# EAGLE board parent (EAGLE 9.6.2)
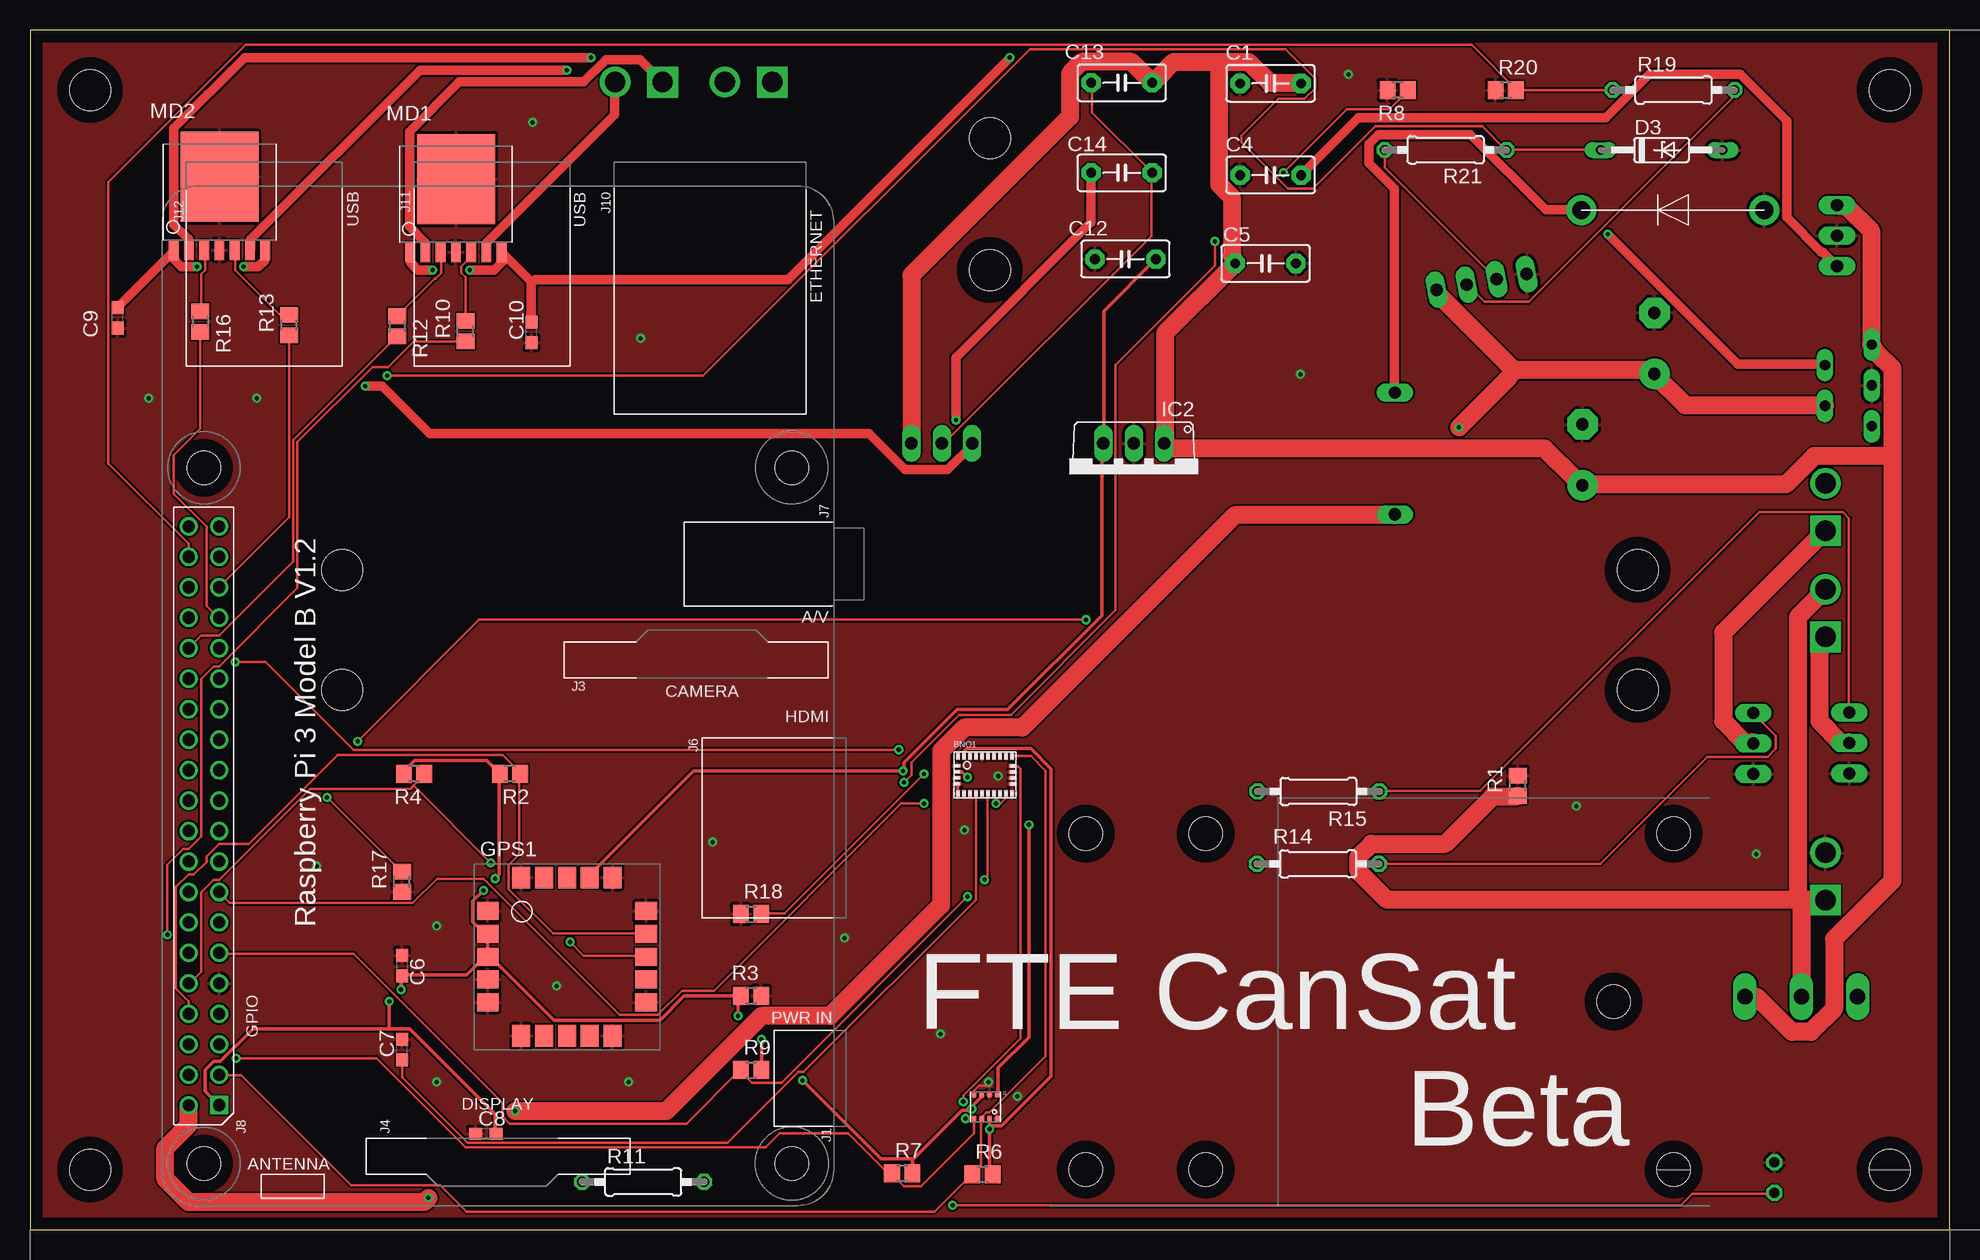
[diagram p0: board, top side]
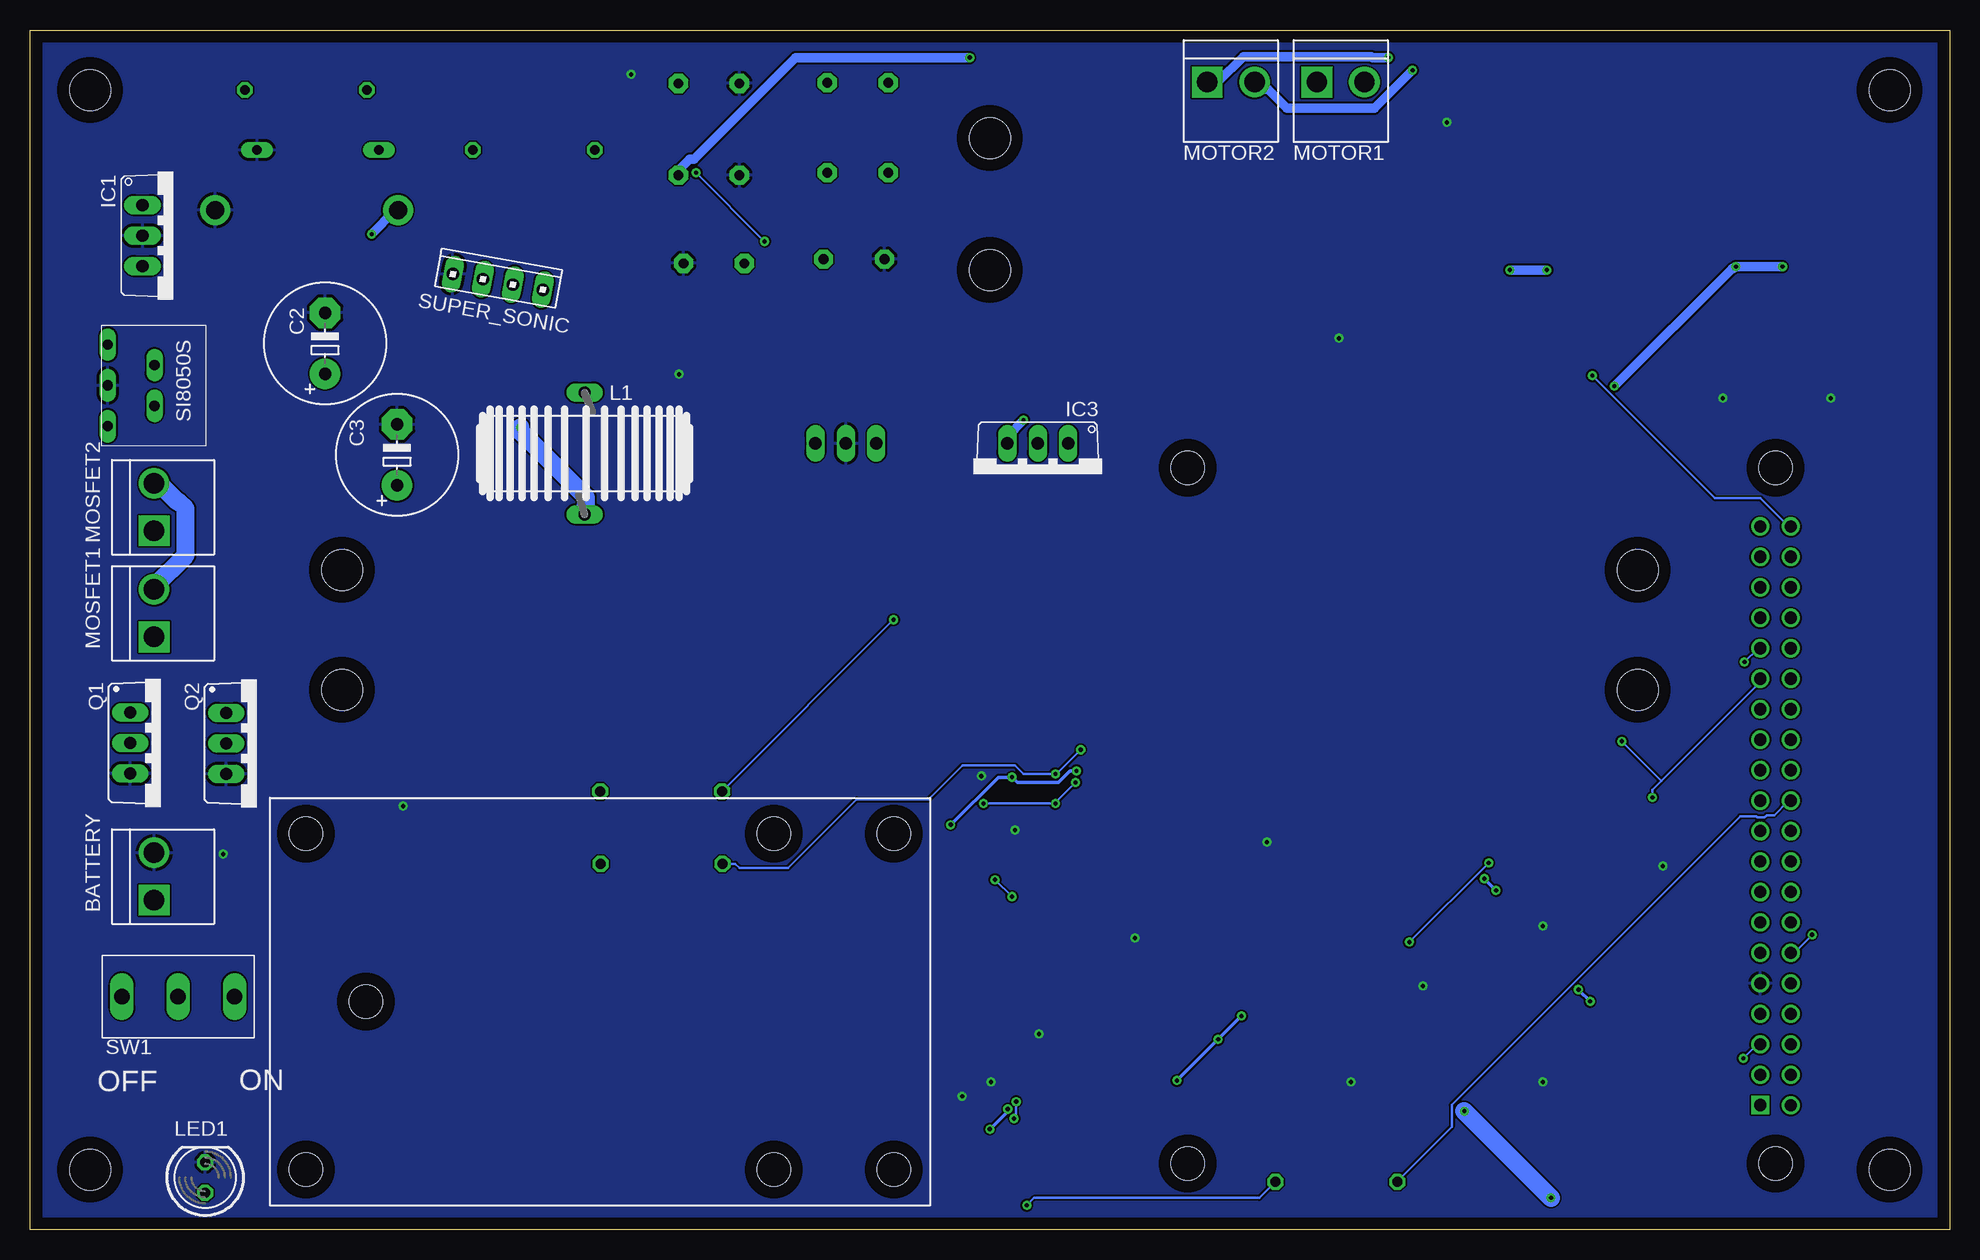
[diagram p1: board, bottom side, seen from below]

Size 160 x 100 mm. Coordinates in mm from the lower left corner, seen from the top.
Outline: 0,0 160,0 160,100 0,100 0,0
Copper layers (1*16): Top 0.035mm / dielectric 1.5mm / Bottom 0.035mm
Design rules "default": minimum track width 6mil, minimum drill 0.35mm, track to track 6mil, track to pad 6mil, pad to pad 6mil, via to via 6mil, smd to smd 6mil, copper to edge 40mil, drill to drill 6mil, minimum pad ring 10mil, minimum via ring 8mil, stop-mask expansion 4mil, vias tented up to drill 0mil, thermal gap 10mil
Net classes: 0 default: width 0.2 mm, clearance 0.05 mm; 1 power: width 1.5 mm, clearance 0.2 mm; 2 mos: width 1.5 mm, clearance 0.2 mm; 3 signal: width 0.2 mm, clearance 0.05 mm; 4 motor: width 0.8 mm, clearance 0.1 mm; 5 sensor: width 0.3 mm, clearance 0.05 mm
Holes 3.4 mm at 5,5 5,95 155,5 155,95 80,91 80,80 26,55 26,45 134,45 134,55
Holes 2.8 mm at 137,33 137,5 98,5 88,5 88,33 98,33 132,19

## Footprints (pad centres in the part's own frame; a part is rotated, then mirrored left to right if it is on the bottom)
B2P-VH = drill 1.7 square: 1 -1.98,0 | drill 1.7: 2 1.98,0
BNO055 = smd 0.305 x 0.61: P$1 0.35,3.47; P$6 0.355,0.35; P$7 0.855,0.35; P$8 1.355,0.35; P$9 1.855,0.35; P$10 2.355,0.35; P$11 2.855,0.35; P$12 3.355,0.35; P$13 3.855,0.35; P$14 4.355,0.35; P$15 4.855,0.35; P$20 4.85,3.47; P$21 4.35,3.47; P$22 3.85,3.47; P$23 3.35,3.47; P$24 2.85,3.47; P$25 2.35,3.47; P$26 1.85,3.47; P$27 1.35,3.47; P$28 0.85,3.47 | smd 0.61 x 0.305: P$2 0.275,2.655; P$3 0.275,2.155; P$4 0.275,1.655; P$5 0.275,1.155; P$16 4.915,1.15; P$17 4.915,1.65; P$18 4.915,2.15; P$19 4.915,2.65
C5B3 = drill 0.813 pad 1.6 octagon: 1 -2.54,0; 2 2.54,0
E5-10,5 = drill 1.016 pad 2.54: + -2.54,0 | drill 1.016 pad 2.54 octagon: - 2.54,0
C1608 = smd 1.1 x 1: 1 -0.85,0; 2 0.85,0
DO35Z10 = drill 0.813 long: A 5.08,0; C -5.08,0
DIODE_1.5 = drill 1.5 pad 2.5: P$1 -7.62,0; P$2 7.62,0
SAM-M8Q = smd 1.8 x 1.5: P$1 1.15,11.55; P$2 1.15,9.65; P$3 1.15,7.75; P$4 1.15,5.85; P$5 1.15,3.95; P$11 14.35,3.95; P$12 14.35,5.85; P$13 14.35,7.75; P$14 14.35,9.65; P$15 14.35,11.55 | smd 1.5 x 1.8: P$6 3.95,1.15; P$7 5.85,1.15; P$8 7.75,1.15; P$9 9.65,1.15; P$10 11.55,1.15; P$16 11.55,14.35; P$17 9.65,14.35; P$18 7.75,14.35; P$19 5.85,14.35; P$20 3.95,14.35
TO220V = drill 1.016 long: 1 -2.54,-2.54; 2 0,-2.54; 3 2.54,-2.54
SFT830D = drill 1.016 long: 1 -5.08,0; 2 5.08,0
LED5MM = drill 0.813 octagon: A -1.27,0; K 1.27,0
BD62**_HRP7 = smd 0.813 x 1.676: P$1 0.887,-0.835; P$2 2.158,-0.835; P$3 3.428,-0.835; P$4 4.697,-0.835; P$5 5.968,-0.835; P$6 7.237,-0.835; P$7 8.508,-0.835 | smd 6.5 x 7.49: P$8 4.7,5.272
RPI3 = drill 1.016 square: P$1 8.37,51.23 | drill 1.016: P$2 8.357,53.772; P$3 10.897,51.232; P$4 10.897,53.772; P$5 13.437,51.232; P$6 13.437,53.772; P$7 15.977,51.232; P$8 15.977,53.772; P$9 18.517,51.232; P$10 18.517,53.772; P$11 21.057,51.232; P$12 21.057,53.772; P$13 23.597,51.232; P$14 23.597,53.772; P$15 26.137,51.232; P$16 26.137,53.772; P$17 28.677,51.232; P$18 28.677,53.772; P$19 31.217,51.232; P$20 31.217,53.772; P$21 33.757,51.232; P$22 33.757,53.772; P$23 36.297,51.232; P$24 36.297,53.772; P$25 38.837,51.232; P$26 38.837,53.772; P$27 41.377,51.232; P$28 41.377,53.772; P$29 43.917,51.232; P$30 43.917,53.772; P$31 46.457,51.232; P$32 46.457,53.772; P$33 48.997,51.232; P$34 48.997,53.772; P$35 51.537,51.232; P$36 51.537,53.772; P$37 54.077,51.232; P$38 54.077,53.772; P$39 56.617,51.232; P$40 56.617,53.772 | hole 2.75: 3.5,3.5; 61.5,3.5; 3.5,52.5; 61.5,52.5
TO220BV = drill 1.016 long: D 0,-2.54; G -2.54,-2.54; S 2.54,-2.54
R2012 = smd 1.3 x 1.5: 1 -0.85,0; 2 0.85,0
0207/10 = drill 0.813 octagon: 1 -5.08,0; 2 5.08,0
BME280 = smd 0.5 x 0.35: P$1 2.275,2.225; P$2 2.275,1.575; P$3 2.275,0.925; P$4 2.275,0.275; P$5 0.225,0.275; P$6 0.225,0.925; P$7 0.225,1.575; P$8 0.225,2.225
SI8050S = drill 0.85 pad 0.9 long: P$1 -3.4,-8.2; P$2 -1.7,-4.3; P$3 0,-8.2; P$4 1.7,-4.3; P$5 3.4,-8.2
10X04MTA = drill 1.016 long: 1 3.81,0; 2 1.27,0; 3 -1.27,0; 4 -3.81,0
TOGGLE_1MS1-T1-B1-M2-Q-N-S = drill 1.3 long: P$1 1.65,3.43; P$2 6.35,3.43; P$3 11.05,3.43

## Placement (x,y rotation side)
BATTERY  [B2P-VH]  149.65,29.43 90 bottom
BNO1  BNO055  [BNO055]  77,36 0 top
C1  0.33u  [C5B3]  103.41,95.55 180 top
C2  1000uF  [E5-10,5]  135.4,73.88 90 bottom
C3  1000uF  [E5-10,5]  129.4,64.58 90 bottom
C4  0.1u  [C5B3]  103.41,87.9 180 top
C5  0.33u  [C5B3]  102.99,80.55 0 top
C6  0.1u  [C1608]  31,22 270 top
C7  0.1u  [C1608]  31,15 90 top
C8  0.1u  [C1608]  38,8 0 top
C9  0.1u  [C1608]  7.3,76 90 top
C10  0.1u  [C1608]  41.8,74.8 90 top
C12  0.1u  [C5B3]  91.31,80.9 180 top
C13  0.33u  [C5B3]  91,95.6 180 top
C14  0.1u  [C5B3]  91,88.1 0 top
D3  GDZJ3.3B  [DO35Z10]  136,90 0 top
DIODE_1.1  DIODE_1.5  [DIODE_1.5]  136.95,84.99 180 top
GPS1  SAM-M8Q  [SAM-M8Q]  37,15 0 top
IC1  NJM7806FA  [TO220V]  148.08,82.86 270 bottom
IC2  TA48033S  [TO220V]  92,63 180 top
IC3  NJM7806FA  [TO220V]  76,63 180 bottom
L1  150uH  [SFT830D]  113.77,64.7 270 bottom
LED1  [LED5MM]  145.4,4.33 90 bottom
MD1  BD622_HFP  [BD62**_HRP7]  30.8,82.3 0 top
MD2  BD622_HFP  [BD62**_HRP7]  11.1,82.5 0 top
MOSFET1  [B2P-VH]  149.65,51.38 90 bottom
MOSFET2  [B2P-VH]  149.65,60.22 90 bottom
MOTOR1  [B2P-VH]  50.75,95.65 0 bottom
MOTOR2  [B2P-VH]  59.91,95.65 0 bottom
PCB1  RPI3RPI3  [RPI3]  67,2 90 top
Q1  2SK4017  [TO220BV]  149.11,40.56 270 bottom
Q2  2SK4017  [TO220BV]  141.11,40.53 270 bottom
R1  1M  [R2012]  124,37 90 top
R2  10k  [R2012]  40,38 180 top
R3  10k  [R2012]  60.1,19.5 0 top
R4  10k  [R2012]  32,38 180 top
R6  10k  [R2012]  79.4,4.6 0 top
R7  10k  [R2012]  72.7,4.7 0 top
R8  10k  [R2012]  114,95 180 top
R9  10k  [R2012]  60.1,13.3 0 top
R10  1k  [R2012]  36.3,74.9 90 top
R11  470  [0207/10]  51.11,3.97 0 top
R12  1k  [R2012]  30.6,75.3 270 top
R13  1k  [R2012]  21.6,75.4 90 top
R14  100  [0207/10]  107.36,30.48 180 top
R15  100  [0207/10]  107.4,36.52 180 top
R16  1k  [R2012]  14.2,75.7 270 top
R17  10k  [R2012]  31,29 90 top
R18  10k  [R2012]  60.1,26.3 0 top
R19  100  [0207/10]  137,95 0 top
R20  10k  [R2012]  123,95 0 top
R21  220  [0207/10]  118,90 180 top
S1  BME280  [BME280]  78.4,11.5 270 top
SI8050S1  SI8050S  [SI8050S]  145.32,70.37 270 bottom
SUPER_SONIC  [10X04MTA]  121,79 350 bottom
SW1  TOGGLE  [TOGGLE_1MS1-T1-B1-M2-Q-N-S]  154,16 0 bottom

## Library data of the parts
BATTERY MOSFET1 MOSFET2 MOTOR1 MOTOR2 = CONN_VH
BNO1 = BNO055
C1 C4 C5 C12-C14 = capacitor-wima
C2 C3 = resistor
C6-C10 = rcl; SPICEPREFIX: C
D3 = diode
DIODE_1.1 = diode_1.5mm
GPS1 = GPS
IC1-IC3 = linear
L1 = inductors; SPICEPREFIX: L
LED1 = led
MD1 MD2 = BD62_
PCB1 = Raspberry Pi 3 model B
Q1 Q2 = transistor-power
R1-R4 R6-R21 = rcl; SPICEPREFIX: R
S1 = BME280
SI8050S1 = SI-8050S
SUPER_SONIC = con-amp
SW1 = switch

## Nets
+3V3@0 [sensor]: BNO1.P$3 C12.1 GPS1.P$17 IC2.3 S1.P$8
+3V3@1 [sensor]: BNO1.P$28 C6.2 C8.2 GPS1.P$2 GPS1.P$3 PCB1.P$1 R2.2 R3.1 R4.2 R6.2 R7.2 R9.2 S1.P$2 S1.P$6
+5V [power]: C2.+ L1.2 PCB1.P$2 SI8050S1.P$4 SUPER_SONIC.1
+6V@0 [motor]: C4.1 C10.2 IC1.3 MD1.P$1 MD1.P$7
+6V@1 [motor]: C9.2 C14.1 IC3.3 MD2.P$1 MD2.P$7
+7.4V [power]: BATTERY.1 MOSFET1.2 MOSFET2.2 R1.1 SW1.P$2
BNO_INT [signal]: BNO1.P$14 PCB1.P$15 R8.1
BNO_RESET [signal]: BNO1.P$11 PCB1.P$11 R9.1
CAP [signal]: BNO1.P$9 C7.1
FIN1 [signal]: PCB1.P$32 R12.2
FIN2 [signal]: PCB1.P$33 R16.2
GND: BATTERY.2 BNO1.P$2 BNO1.P$4 BNO1.P$5 BNO1.P$6 BNO1.P$15 BNO1.P$16 BNO1.P$17 BNO1.P$18 BNO1.P$25 C1.2 C2.- C3.- C4.2 C5.2 C6.1 C7.2 C8.1 C9.1 C10.1 C12.2 D3.A DIODE_1.1.P$1 GPS1.P$1 GPS1.P$4 GPS1.P$5 GPS1.P$6 GPS1.P$10 GPS1.P$11 GPS1.P$15 GPS1.P$16 GPS1.P$20 IC1.2 IC2.2 LED1.K MD1.P$4 MD1.P$8 MD2.P$4 MD2.P$8 PCB1.P$9 Q1.S Q2.S R1.2 R3.2 R8.2 R17.1 R18.1 R20.1 S1.P$1 S1.P$5 S1.P$7 SI8050S1.P$3 SUPER_SONIC.4
GPS_RXD [signal]: GPS1.P$14 PCB1.P$8 R2.1
GPS_TXD [signal]: GPS1.P$13 PCB1.P$10 R4.1
MOSFET1 [signal]: PCB1.P$29 R15.2 R17.2
MOSFET2 [signal]: PCB1.P$31 R14.2 R18.2
MOTOR11 [motor]: MD1.P$2 MOTOR1.1
MOTOR12 [motor]: MD1.P$6 MOTOR1.2
MOTOR21 [motor]: MD2.P$2 MOTOR2.1
MOTOR22 [motor]: MD2.P$6 MOTOR2.2
N$2 [motor]: DIODE_1.1.P$2 L1.1 SI8050S1.P$2
N$3 [signal]: PCB1.P$22 R11.1
N$4 [power]: C1.1 C3.+ C5.1 C13.1 IC1.1 IC2.1 IC3.1 SI8050S1.P$1 SW1.P$3
N$5: LED1.A R11.2
N$6 [mos]: MOSFET1.1 Q1.D
N$7: MD1.P$3 R12.1
N$8 [mos]: MOSFET2.1 Q2.D
N$9: MD1.P$5 R10.2
N$10: Q1.G R15.1
N$11: Q2.G R14.1
N$12: MD2.P$3 R16.1
N$13: C13.2 C14.2 IC3.2
N$14: MD2.P$5 R13.2
N$15: R19.2 SUPER_SONIC.2
N$16: R21.2 SUPER_SONIC.3
RIN1 [signal]: PCB1.P$12 R10.1
RIN2 [signal]: PCB1.P$35 R13.1
SCL [signal]: BNO1.P$19 PCB1.P$5 R7.1 S1.P$4
SDA [signal]: BNO1.P$20 PCB1.P$3 R6.1 S1.P$3
SONIC_ECHO [signal]: D3.C PCB1.P$40 R21.1
SONIC_TRIG [signal]: PCB1.P$38 R19.1 R20.2

## Tracks (layer width: path | path; a pad name or v marks a point on that pad's centre or on a via)
+3V3@0  (via drill 0.35)
  Top 0.3: C12.1 93.83,80.88 89.51,76.56 89.51,65.55 IC2.3 89.33,65.46 89.33,51.19 81.49,43.34 77.26,43.34 72.86,38.94 72.86,38.32 v72.77,38.23 55.33,38.23 46.69,29.6 46.69,29.43 GPS1.P$17 | v83.25,33.74 83.25,16.03 80.7,13.48 80.7,11.28 S1.P$8 | v78.14,37.71 77.7,38.15 77.35,38.15 BNO1.P$3
  Bottom 0.3: v83.25,33.74 79.29,37.71 v78.14,37.71 77.7,37.27 74.27,37.27 73.3,38.23 v72.77,38.23
+3V3@1  (via drill 0.35)
  Top 0.3: 78.41,10.13 78.23,9.96 77.7,9.96 73.56,5.82 | 78.41,10.13 79.29,11.01 79.29,11.19 S1.P$6 | 73.56,5.82 73.56,4.76 R7.2 | 80,8.63 v80,8.37 80,4.85 80.17,4.67 R6.2 | 80,8.63 80,9.16 S1.P$2 | 80,8.63 80.96,8.63 85.11,12.77 85.11,38.41 83.43,40.09 78.06,40.09 77.88,39.91 77.88,39.56 BNO1.P$28 | v78.5,10.04 78.41,10.13 | 29.95,16.74 18.59,16.74 15.86,14.01 15.33,14.01 14.62,13.3 14.62,11.54 15.77,10.4 PCB1.P$1 | 29.95,16.74 31.63,16.74 38.76,9.6 38.76,8.02 C8.2 | R4.2 31.19,38.06 31.19,38.23 32.07,39.12 38.06,39.12 39.12,38.06 R2.2 39.12,37.88 39.12,29.6 v38.76,29.25 | GPS1.P$3 38.15,22.73 37.88,22.73 36.38,21.23 31.01,21.23 C6.2 30.92,21.06 v30.92,20 | GPS1.P$3 38.23,22.64 38.5,22.64 43.7,17.44 52.51,17.44 54.53,19.47 59.2,19.47 R3.1 59.03,19.38 v59.03,17.8 | v60.97,15.86 60.97,13.3 R9.2 | GPS1.P$3 38.15,22.82 38.15,24.58 GPS1.P$2 38.06,24.76 37.8,24.76 36.91,25.64 36.91,27.4 v37.8,28.28 | v29.95,19.03 29.95,16.74 | v64.4,12.42 70.92,5.9 73.47,5.9 73.56,5.82
  Bottom 0.3: v78.5,10.04 78.5,9.87 v80,8.37 | v59.03,17.8 v60.97,15.86 v64.4,12.42 | v37.8,28.28 v38.76,29.25 | v30.92,20 v29.95,19.03
+5V  (via drill 0.35)
  Top 1.5: SI8050S1.P$4 149.59,68.72 137.97,68.72 135.41,71.27 C2.+ 134.71,71.62 123.69,71.62 | 123.69,71.62 117.26,78.06 117.26,78.32 SUPER_SONIC.1 | v33.21,2.64 32.86,2.29 13.21,2.29 11.28,4.23 11.28,6.78 13.21,8.72 13.21,10.31 PCB1.P$2 | v40.44,9.87 53.04,9.87 60.97,17.8 66.69,17.8 75.94,27.05 75.94,39.91 77.88,41.85 82.73,41.85 100.43,59.56 113.74,59.56 L1.2 | v119.11,66.87 123.25,71.01 123.69,71.62
  Bottom 1.5: v40.44,9.87 v33.21,2.64 | v119.11,66.87 119.11,66.52 113.65,61.05 113.65,60.26 113.74,60.17 113.74,59.64 L1.2
+6V@0  (via drill 0.35)
  Top 0.8: 41.76,79.03 41.76,75.68 C10.2 | 41.76,79.03 39.38,81.4 MD1.P$7 39.47,80.79 38.68,80 v36.65,80 | v33.57,80 32.33,80 31.72,80.61 31.72,81.4 MD1.P$1 | IC1.3 150.56,80.35 149.42,81.49 149.33,81.49 146.42,84.4 146.42,92.42 142.55,96.29 134.97,96.29 131.36,92.68 110.74,92.68 105.98,87.92 C4.1 | v81.67,97.7 63.17,79.2 42.11,79.2 41.76,79.03
  Bottom 0.8: v36.65,80 v33.57,80 | v81.67,97.7 96.2,97.7 104.66,89.25 105.02,89.25 105.9,88.36 105.9,87.92 C4.1
+6V@1  (via drill 0.35)
  Top 0.8: C9.2 7.31,76.91 11.98,81.58 MD2.P$1 11.89,80.96 12.6,80.26 v13.92,80.26 | v17.8,80.26 19.03,80.26 19.56,80.79 19.56,81.58 MD2.P$7 | v77.18,67.48 77.18,72.68 88.45,83.96 C14.1 | v27.93,70.3 29.34,70.3 33.3,66.34 69.95,66.34 72.95,63.34 76.47,63.34 78.58,65.46 IC3.3
  Bottom 0.8: v13.92,80.26 v17.8,80.26 18.15,80.08 v27.93,70.3 | v77.18,67.48 78.5,66.16 78.5,65.55 IC3.3
+7.4V
  Top 1.5: 147.66,27.49 149.59,27.49 BATTERY.1 | 147.66,27.49 147.39,27.49 | 147.39,27.49 113.12,27.49 110.74,29.87 110.74,31.1 111.8,32.16 117.97,32.16 121.93,36.12 123.96,36.12 R1.1 | 147.66,27.49 147.66,19.47 SW1.P$2 | 147.39,27.49 147.39,51.1 149.59,53.3 MOSFET1.2
  Bottom 1.5: MOSFET2.2 149.59,62.2 149.24,62.2 147.74,60.7 147.66,60.7 147.04,60.08 147.04,56.21 149.59,53.65 149.59,53.39 MOSFET1.2
BNO_INT  (via drill 0.35)
  Top 0.2: v80.52,35.5 80.88,35.5 81.32,35.95 81.32,36.3 BNO1.P$14 | v74.53,35.5 72.59,35.5 57,19.91 54.36,19.91 52.33,17.88 49.16,17.88 37.8,29.25 33.92,29.25 31.89,27.22 16.65,27.22 15.77,28.1 PCB1.P$15 | v104.49,88.1 109.77,93.39 113.3,93.39 114.09,94.18 114.09,94.27 114.79,94.97 R8.1 | v98.76,82.37 98.76,80.35 90.48,72.07 90.48,51.63 81.76,42.91 77.44,42.91 73.47,38.94 73.47,37.88 v72.86,37.27
  Bottom 0.2: v80.52,35.5 v74.53,35.5 74.53,35.59 v72.86,37.27 | v98.76,82.37 v104.49,88.1
BNO_RESET  (via drill 0.35)
  Top 0.2: v79.55,29.16 79.82,29.43 79.82,36.3 BNO1.P$11 | v78.14,27.75 62.64,12.25 60.17,12.25 59.2,13.21 R9.1 59.12,13.21 54.71,8.81 40,8.81 39.38,9.43 39.38,10.57 26.96,22.99 15.77,22.99 PCB1.P$11
  Bottom 0.2: v78.14,27.75 v79.55,29.16
CAP
  Top 0.2: BNO1.P$9 78.85,36.3 78.85,27.49 64.49,13.13 64.05,13.13 58.15,7.22 36.47,7.22 31.01,12.69 31.01,14.1 C7.1
FIN1
  Top 0.2: R12.2 30.57,74.44 21.94,65.81 21.94,55.68 15.77,49.51 14.27,49.51 13.3,48.54 PCB1.P$32
FIN2
  Top 0.2: R16.2 14.18,74.8 14.18,66.78 11.98,64.58 11.98,61.32 14.71,58.59 14.71,51.98 15.68,51.01 PCB1.P$33
GND  (via drill 0.35)
  Top 0.2: S1.P$5 78.67,11.57 79.1,12 80,12 | BNO1.P$5 77.36,37.08 BNO1.P$6
  other vias: 82.3,11.1 79.9,12.3 67.9,24.3 56.9,32.3 77.9,33.3 80.7,37.8 75.9,16.3 50.9,74.3 33.9,12.3 33.9,25.3 23.9,30.3 128.9,35.3 143.9,31.3 105.9,71.3 109.9,96.3 41.9,92.3 18.9,69.3 9.9,69.3 49.9,12.3 43.9,20.3
  pour Bottom: 0,0 160,0 160,100 0,100
  pour Top: 0,0 160,0 160,100 0,100
GPS_RXD
  Top 0.2: GPS1.P$14 51.27,24.67 43.61,24.67 39.91,28.37 39.91,30.39 40.79,31.28 40.79,37.97 R2.1 40.88,38.06 39.38,39.56 25.64,39.56 18.24,32.16 15.77,32.16 14.71,31.1 14.71,30.66 13.65,29.6 13.21,29.6 12.16,28.54 12.16,20.09 13.21,19.03 13.21,18.06 PCB1.P$8
GPS_TXD  (via drill 0.35)
  Top 0.2: 31.98,37 31.72,36.74 23.35,36.74 15.77,29.16 15.33,29.16 14.27,28.1 14.27,21.5 13.3,20.53 PCB1.P$10 | 31.98,37 32.77,37.8 32.77,37.97 R4.1 | v45.02,23.96 46.16,22.82 51.27,22.82 GPS1.P$13 | 31.98,37 v38.41,30.57
  Bottom 0.2: v38.41,30.57 v45.02,23.96
MOSFET1  (via drill 0.35)
  Top 0.2: v24.76,36.03 30.92,29.87 R17.2 | v88.01,50.83 37.44,50.83 v27.31,40.7
  Bottom 0.2: v24.76,36.03 24.76,36.65 24.01,37.4 | 24.01,37.4 15.77,45.64 15.77,45.9 PCB1.P$29 | v88.01,50.83 102.28,36.56 R15.2 | 24.01,37.4 v27.31,40.7
MOSFET2  (via drill 0.35)
  Top 0.2: v74.53,37.97 62.9,26.34 60.97,26.34 R18.2 | v17.09,47.31 19.65,47.31 26.96,40 v72.42,40
  Bottom 0.2: R14.2 102.2,30.48 101.23,30.48 100.87,30.13 96.82,30.13 91.09,35.86 85.11,35.86 82.28,38.68 77.88,38.68 77.18,37.97 v74.53,37.97 74.44,37.97 v72.42,40 | v17.09,47.31 15.95,48.45 PCB1.P$31
MOTOR11
  Top 0.8: MD1.P$2 32.95,81.49 32.95,82.28 31.63,83.61 31.63,91.54 35.77,95.68 46.16,95.68 48.01,97.53 50.83,97.53 52.68,95.68 MOTOR1.1
MOTOR12
  Top 0.8: MD1.P$6 38.06,81.49 38.06,82.28 48.72,92.94 48.72,95.59 MOTOR1.2
MOTOR21  (via drill 0.35)
  Top 0.8: v46.78,97.7 17.88,97.7 11.98,91.8 11.98,83.78 13.21,82.55 13.21,81.67 MD2.P$2
  Bottom 0.8: v46.78,97.7 48.1,97.7 48.19,97.79 58.85,97.79 60.97,95.68 61.85,95.68 MOTOR2.1
MOTOR22  (via drill 0.35)
  Top 0.8: v44.76,96.65 32.51,96.65 18.41,82.55 18.41,81.67 MD2.P$6
  Bottom 0.8: v44.76,96.65 47.93,93.47 55.24,93.47 56.83,95.06 57,95.06 57.53,95.59 57.88,95.59 MOTOR2.2
N$2  (via drill 0.35)
  Top 0.8: v131.53,82.99 142.37,72.15 149.59,72.15 SI8050S1.P$2 | L1.1 113.74,69.86 113.74,86.78 111.62,88.89 111.62,90.48 112.42,91.27 120.08,91.27 126.33,85.02 129.24,85.02 DIODE_1.1.P$2
  Bottom 0.8: v131.53,82.99 129.59,84.93 129.33,84.93 DIODE_1.1.P$2
N$3
  Bottom 0.2: R11.1 45.99,4.05 41.49,8.55 41.49,10.4 17.44,34.45 16.12,34.45 16.03,34.36 15.42,34.36 15.24,34.53 14.62,34.53 13.48,35.68 13.3,35.68 PCB1.P$22
N$4
  Top 1.5: IC3.1 73.47,65.55 73.47,79.55 86.69,92.77 86.69,96.38 87.66,97.35 91.8,97.35 93.47,95.68 C13.1 94.09,96.12 95.32,97.35 99.11,97.35 | 99.11,97.35 101.58,97.35 103.34,95.59 105.9,95.59 C1.1 | 99.11,97.35 99.11,87.13 100.17,86.07 100.17,81.23 C5.1 100.43,80.52 94.62,74.71 94.62,65.55 IC2.1 95.24,65.11 126.25,65.11 128.8,62.55 C3.+ 129.42,62.11 146.33,62.11 148.71,64.49 155.23,64.49 | IC1.1 150.65,85.37 151.36,85.37 153.47,83.25 153.47,73.83 SI8050S1.P$1 153.91,73.12 155.23,71.8 155.23,64.49 | 155.23,64.49 155.23,29.07 150.39,24.23 150.39,18.41 148.45,16.48 146.86,16.48 143.96,19.38 142.99,19.38 SW1.P$3
N$5  (via drill 0.35)
  Top 0.2: v76.91,2.03 137.61,2.03 138.58,3 145.37,3 LED1.A
  Bottom 0.2: v76.91,2.03 76.3,2.64 57.53,2.64 56.21,3.96 R11.2
N$6
  Top 1.5: Q1.D 151.62,40.61 150.91,40.61 149.15,42.38 149.15,48.9 149.59,49.34 MOSFET1.1
N$7
  Top 0.2: R12.1 30.66,76.21 33.74,79.29 33.83,79.29 34.27,79.73 34.27,81.4 MD1.P$3
N$8
  Top 1.5: Q2.D 143.6,40.61 142.9,40.61 141.14,42.38 141.14,49.78 149.59,58.23 MOSFET2.1
N$9
  Top 0.2: R10.2 36.3,75.77 36.3,79.38 35.95,79.73 35.95,80.26 36.74,81.05 36.74,81.4 MD1.P$5
N$10
  Top 0.2: R15.1 112.5,36.56 120.87,36.56 144.13,59.82 151.09,59.82 151.62,59.29 151.62,43.17 Q1.G
N$11
  Top 0.2: R14.1 112.5,30.48 130.92,30.48 139.81,39.38 144.84,39.38 145.54,40.09 145.54,41.14 143.69,42.99 Q2.G
N$12
  Top 0.2: R16.1 14.27,76.56 14.27,79.64 14.62,80 14.62,81.49 14.54,81.58 MD2.P$3
N$13
  Top 0.2: IC3.2 76.03,65.55 76.21,65.55 93.47,82.81 93.47,88.1 C14.2 93.47,88.19 88.54,93.12 88.54,95.59 C13.2
N$14
  Top 0.2: R13.2 21.58,76.3 20.79,76.3 17.09,80 17.09,81.58 MD2.P$5
N$15
  Top 0.2: R19.2 142.02,94.97 142.02,94.44 124.93,77.35 121.23,77.35 119.82,78.76 SUPER_SONIC.2
N$16
  Top 0.2: R21.2 112.94,89.95 112.94,88.54 122.19,79.29 SUPER_SONIC.3
RIN1  (via drill 0.35)
  Top 0.2: v11.45,24.58 11.45,30.39 12.77,31.72 13.21,31.72 14.27,32.77 14.27,45.9 15.33,46.96 15.77,46.96 22.29,53.48 22.29,65.64 28.54,71.89 29.87,71.89 31.98,74 36.3,74 R10.1
  Bottom 0.2: v11.45,24.58 12.95,23.08 13.21,23.08 PCB1.P$12
RIN2
  Top 0.2: R13.1 21.58,74.53 21.58,59.38 15.77,53.56 PCB1.P$35
SCL  (via drill 0.35)
  Top 0.2: v77.79,10.66 77.79,11.19 82.55,15.95 82.55,38.41 82.37,38.59 81.93,38.59 BNO1.P$19 | v77.97,9.25 78.58,9.25 S1.P$4 78.67,9.16 78.67,8.02 74.27,3.61 72.86,3.61 71.8,4.67 R7.1 71.71,4.67 71.54,4.67 68.19,8.02 62.46,8.02 61.32,6.87 36.3,6.87 28.9,14.27 v17.18,14.27
  Bottom 0.2: v77.79,10.66 77.79,9.43 v77.97,9.25 | v17.18,14.27 16.03,15.42 15.77,15.42 PCB1.P$5
SDA
  Top 0.2: BNO1.P$20 81.93,39.47 83.43,39.47 84.66,38.23 84.66,14.45 80,9.78 79.73,9.78 79.38,9.43 79.38,9.25 S1.P$3 79.29,9.16 79.29,5.37 78.58,4.67 R6.1 78.5,4.58 75.41,1.5 36.38,1.5 34.18,3.7 26.78,3.7 17.62,12.86 15.77,12.86 PCB1.P$3
SONIC_ECHO  (via drill 0.35)
  Top 0.2: D3.C 130.92,90.04 123.16,90.04 R21.1 122.99,90.04 121.05,91.98 112.15,91.98 106.95,86.78 104.84,86.78 100.96,90.66 100.96,91.18 104.05,94.27 106.25,94.27 107.13,95.15 107.13,95.94 104.66,98.41 83.34,98.41 56.12,71.19 v29.78,71.19
  Bottom 0.2: v29.78,71.19 19.56,60.97 15.77,60.97 13.48,58.67 13.3,58.67 PCB1.P$40
SONIC_TRIG
  Top 0.2: R19.1 131.89,94.97 123.87,94.97 R20.2 123.87,95.06 120.17,98.76 17.97,98.76 6.52,87.31 6.52,63.87 13.21,57.18 13.21,56.12 PCB1.P$38

## Text on the board
tPlace: FTE CanSat / Beta
bPlace: ON | OFF